# Altium PCB WaterLevelRF.PcbDoc
Units mm, origin at the board's own origin, x right, y up, seen from the top; angles counter-clockwise.
Board outline 44.25 x 29.25 mm, 2 copper layers (Top Layer, Bottom Layer); 33 components, 34 nets, 133 pads, 4 vias.
Unrouted connection lines stored in the file: 81.
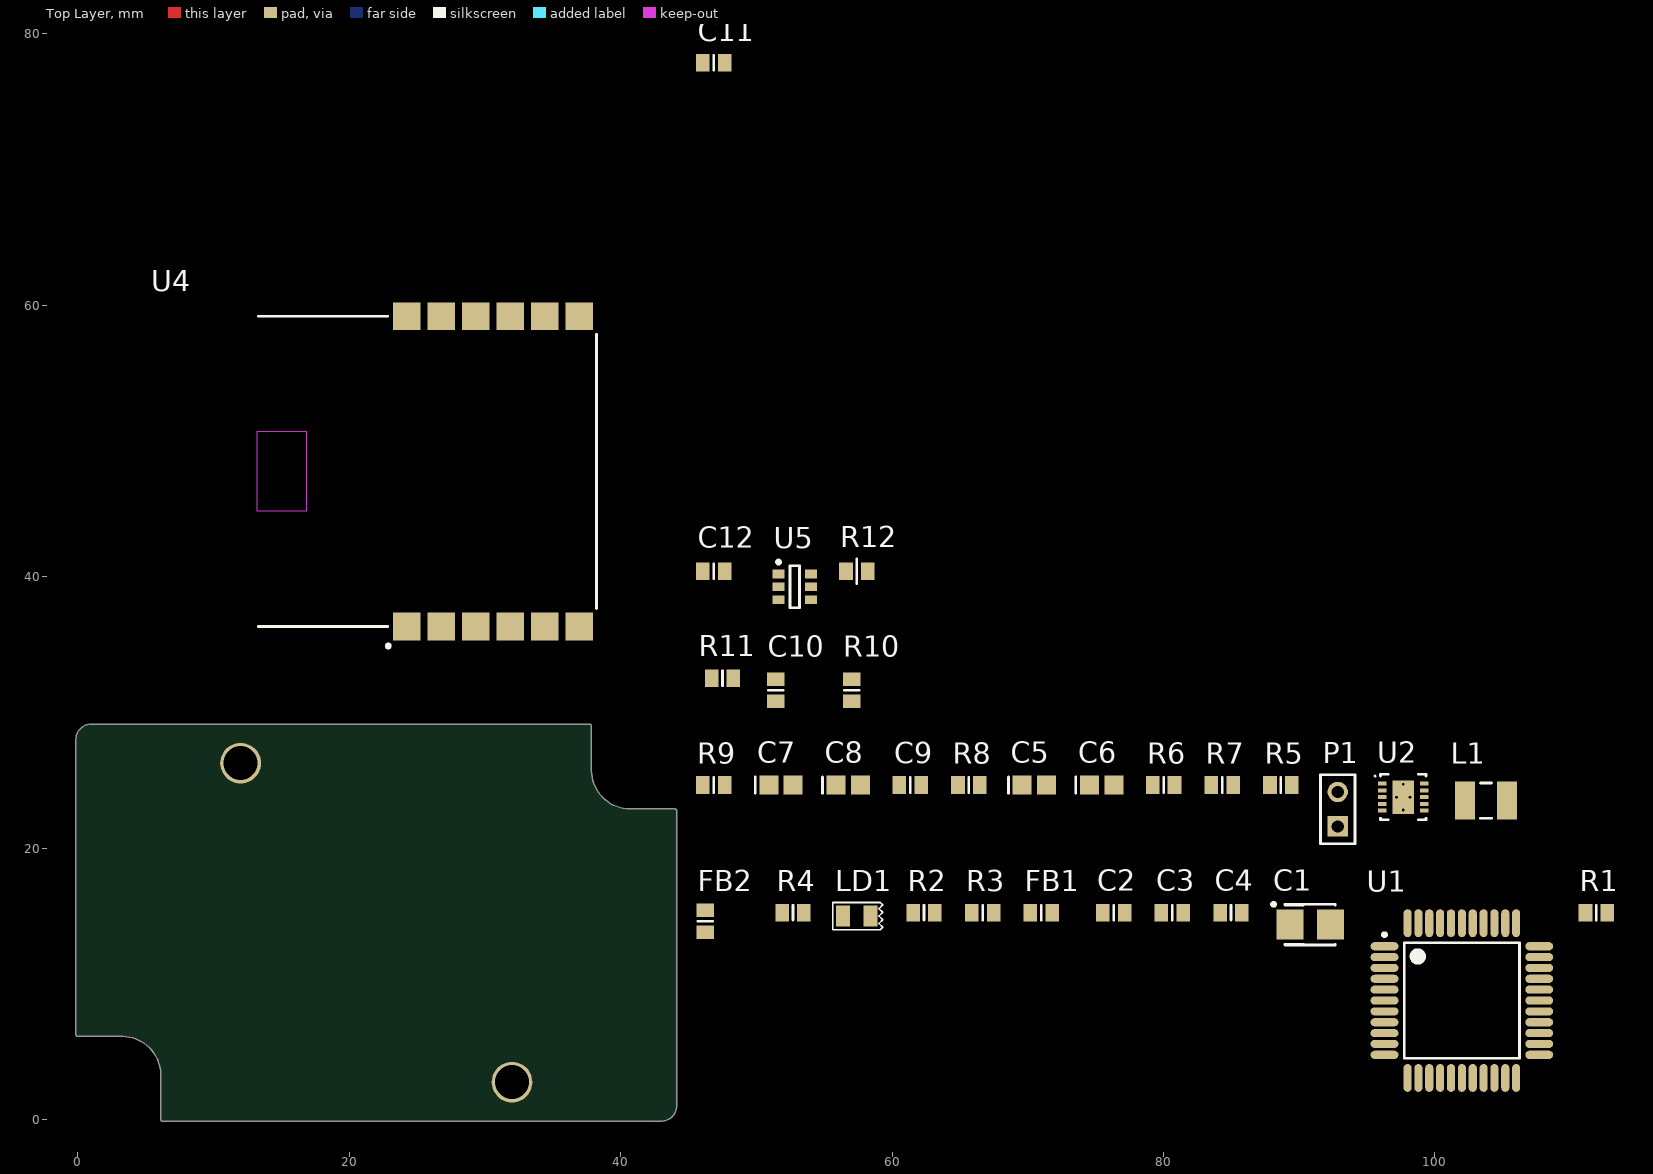
[diagram p0: Top Layer view]
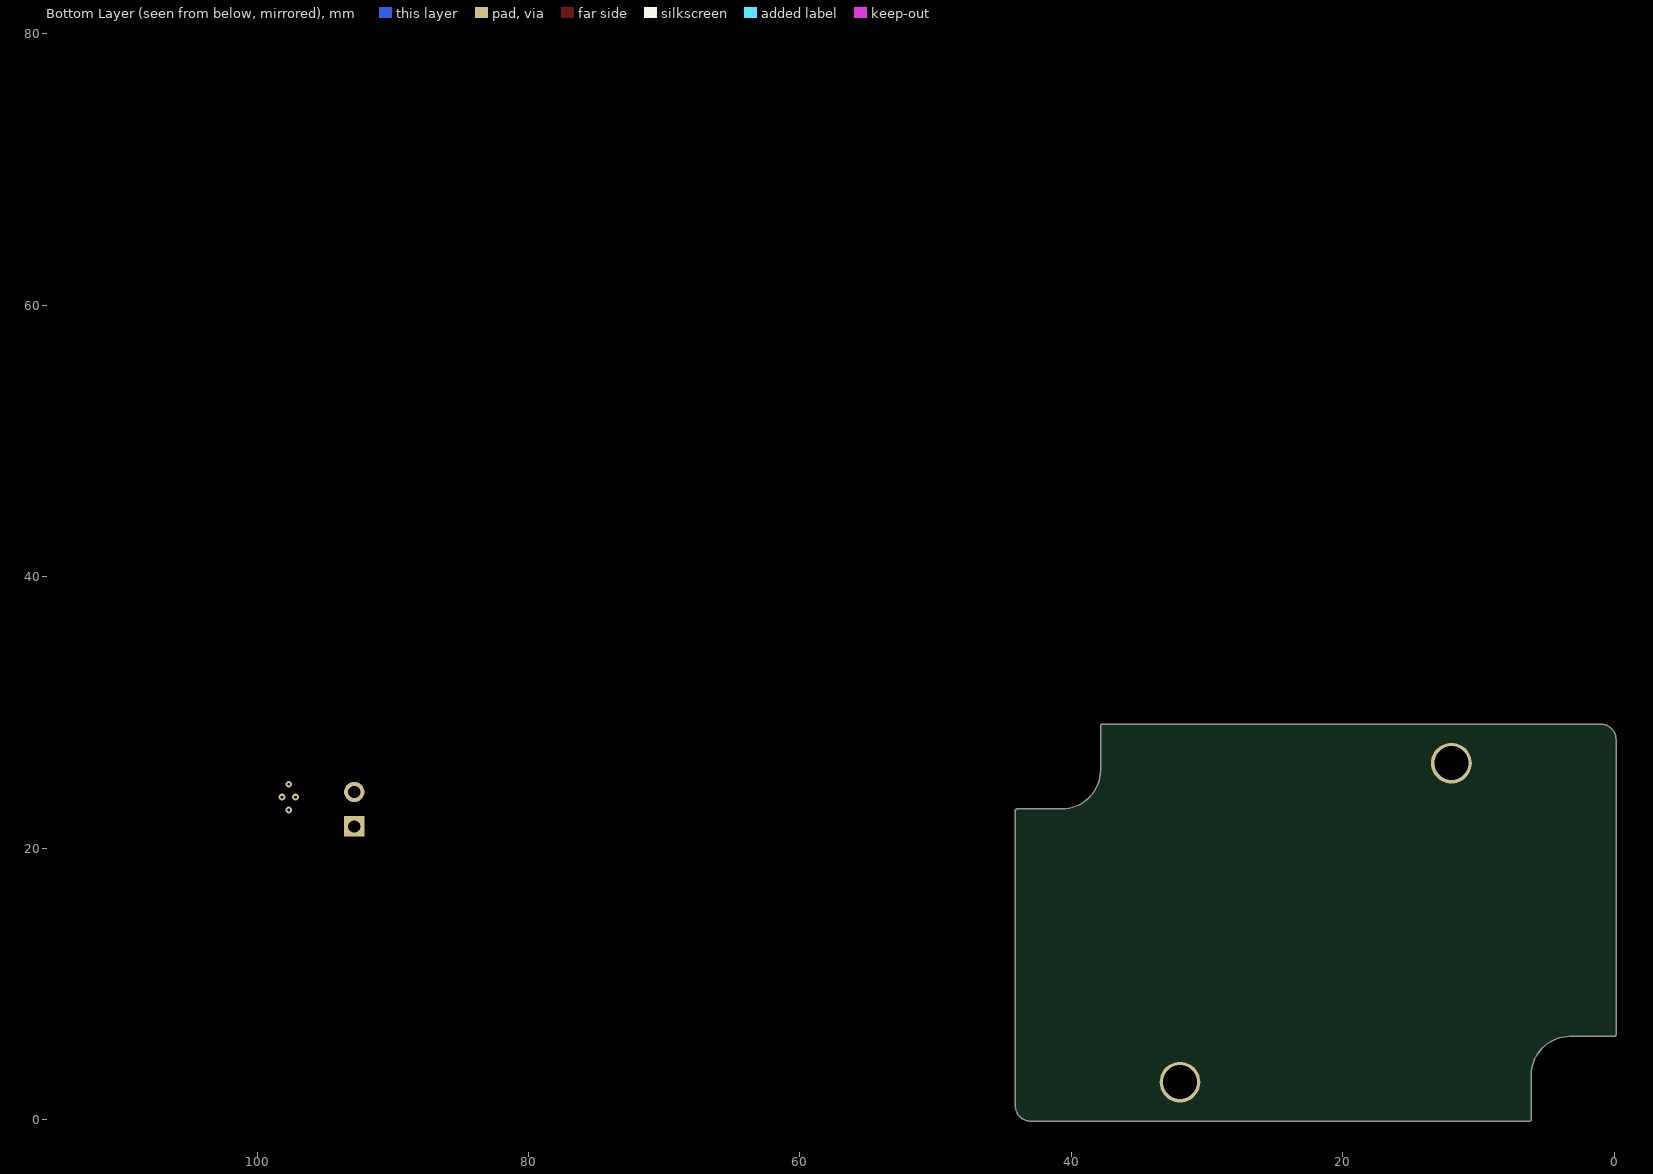
[diagram p1: Bottom Layer view, seen from below]

## Layer stack, top to bottom
Top Layer: signal copper 0.0356
Dielectric: dielectric 0.32, FR-4, Dk 4.8
Bottom Layer: signal copper 0.0356

## Board outline
3.3,6.122 cw(c3.25,3.25) 6.122,3.3 ccw(c6.25,3.302) 6.123,3.292 6.123,0.011 ccw(c6.25,0) 6.25,-0.127 43,-0.127 ccw(c43,1) 44.127,1 44.127,22.75 ccw(c44,22.75) 43.985,22.876 43.984,22.876 ccw(c43.969,22.75) 43.969,22.877 40.677,22.877 ccw(c40.667,22.75) 40.669,22.878 cw(c40.719,25.75) 37.847,25.7 ccw(c37.719,25.698) 37.846,25.708 37.846,29 ccw(c37.719,29) 37.719,29.127 1,29.127 ccw(c1,28) -0.127,28 -0.127,6.25 ccw(c0,6.25) 0,6.123 3.292,6.123 ccw(c3.302,6.25)

## Design rules (kind name [scope] priority, off if disabled: settings)
Clearance [All] p1: gap=0.254
PolygonConnect [All] p1: connectstyle=Relief reliefconductorwidth=0.254 reliefentries=4 polygonreliefangle="90 Angle"
RoutingVias [All] p1: holewidth=0.711 width=1.27 viastyle="Through Hole" minholewidth=0.711 minwidth=1.27 maxholewidth=0.711 maxwidth=1.27
SilkscreenOverComponentPads [All] p1: minsilkscreentomaskgap=0.254
SolderMaskExpansion [All] p1: expansion=0.102
Width [All] p1: maxlimit=0.254 minlimit=0.254 preferedwidth=0.254
27 further rules are at their usual default settings.

## Classes and differential pairs
component class U_ZIGBEE: C11 U4
component class U_SONAR: C10 R10 R11 U3
component class U_CPU: C1 C2 C3 C4 FB1 FB2 J1 LD1 R1 R2 R3 R4 R5 U1
component class U_PSU: C5 C6 C7 C8 C9 D1 L1 P1 P2 R5 R6 R7 R8 R9 R18 R19 U2
component class U_TEMP: C10 C12 R12 U5

## Components (designator, comment, footprint, x,y, rotation, side; value= is the part's Value field where it differs from the comment)
C1 "Cap Pol3" B 90.805,14.351 r0 top
C2 "CAP0603-" RESC2012L 76.327,15.24 r0 top
C3 "CAP0603-" RESC2012L 80.645,15.24 r0 top
C4 "CAP0603-" RESC2012L 84.963,15.24 r0 top
C5 "CAP0603-" CAPC2512L 70.485,24.638 r0 top
C6 "CAP0603-" CAPC2512L 75.438,24.638 r0 top
C7 "CAP0603-" CAPC2512L 51.816,24.638 r0 top
C8 "CAP0603-" CAPC2512L 56.769,24.638 r0 top
C9 "CAP0603-" RESC2012L 61.341,24.638 r0 top
C10 "CAP0805-100NF" RESC2012L 51.435,31.623 r90 top
C11 "CAP0603-" RESC2012L 46.863,77.851 r0 top
C12 "Cap Semi" RESC2012L 46.863,40.386 r0 top
FB1 "MMZ2012R121A" RESC2012L 70.993,15.24 r0 top
FB2 "MMZ2012R121A" RESC2012L 46.228,14.605 r90 top
L1 "?" INDC3225M 103.759,23.495 r0 top
LD1 "LED" LED805 56.388,14.986 r0 top
P1 "Header 2" HDR1X2 92.837,21.59 r90 top
R1 "RES0603-" RESC2012L 111.887,15.24 r0 top
R2 "RES0603-" RESC2012L 62.357,15.24 r0 top
R3 "RES0603-" RESC2012L 66.675,15.24 r0 top
R4 "RES0603-" RESC2012L 52.705,15.24 r0 top
R5 "RES0603-" RESC2012L 88.646,24.638 r0 top
R6 "RES0603-" RESC2012L 80.01,24.638 r0 top
R7 "RES0603-" RESC2012L 84.328,24.638 r0 top
R8 "RES0603-" RESC2012L 65.659,24.638 r0 top
R9 "RES0603-" RESC2012L 46.863,24.638 r0 top
R10 "RES0805-10K" RESC2012L 57.023,31.623 r90 top
R11 "RES0805-10K" RESC2012L 47.498,32.512 r0 top
R12 "Res Semi" RES0805 57.404,40.386 r0 top
U1 "PIC24HJ64GP504T-I/PT" TQFP-PT44_M 101.981,8.763 r0 top
U2 "TPS63060" SON50P300X300X100-11V 97.663,23.749 r0 top
U4 "MRF24J40MB-I/RM" MRF24J40MB 13.208,47.752 r90 top
U5 "TMP101" SOT23-6_L 52.832,39.243 r0 top

## Footprints (in the part's own frame and the unit in brackets; to place one, negate y for a bottom-side part, rotate by r counter-clockwise, add the part's x,y. Pads: shape width x height; smd on the part's side, far side on the other; paste and mask are expansions set on the pad)
B [mm] "Capacitor, SM Tantalum; Body 3.5 x 2.8 mm (LxW typ)"
  rect 2x2.2 smd: 1(-1.5,0) 2(1.5,0)
  silkscreen extent -2.82,-1.5 1.85,1.62
CAPC2512L [mm] "Chip Capacitor, Body 2.54x1.27mm, IPC High Density"
  rect 1.4x1.4 smd: 1(-0.9,0) 2(0.9,0)
  silkscreen extent -1.9,-0.6 -1.9,0.6, body extent -1.45,-0.82 1.45,0.82, height 1.66
HDR1X2 [mm] "Connector; Header; 2 Position"
  rect 1.5x1.5 hole 0.9: 1(0,0)
  round 1.5 hole 0.9: 2(2.54,0)
  silkscreen extent -1.27,-1.27 3.81,1.27
INDC3225M [mm] "Chip Inductor, Body 3.2x2.5mm, IPC Low Density"
  rect 1.5x2.8 smd: 1(-1.55,0) 2(1.55,0)
  silkscreen extent -0.4,-1.3 0.4,1.3, body extent -1.7,-1.35 1.7,1.35, height 1.5
LED805 [mil]
  rect 40x60 smd: A(0,0) K(80,0)
  silkscreen extent -30,-39 115,39
MRF24J40MB [mil] "SM Module; 12 Leads; Body 33x22.9x2.5mm (LxWxH), Microchip Recommended"
  rect 80x80 smd paste-159.45 mask+2: 1(-450,-435) 2(-450,-535) 3(-450,-635) 4(-450,-735) 5(-450,-835) 6(-450,-935) 7(450,-935) 8(450,-835) 9(450,-735) 10(450,-635) 11(450,-535) 12(450,-435)
  Top Layer keep-out region: -115,-145 115,-145 115,0 -115,0
  silkscreen extent -511,-985 450,-4, body extent -450,-985 450,315, height 100
RES0805 [mm] "Chip Resistor Body 2.0x1.3mm, IPC High Density"
  rect 1x1.3 smd: 1(-0.8,0) 2(0.8,0)
  silkscreen extent 0,-0.9 0,0.9, body extent -1.07,-0.7 1.07,0.7, height 0.65
RESC2012L [mm] "Chip Resistor, Body 2.0x1.3mm, IPC High Density"
  rect 1x1.3 smd: 1(-0.8,0) 2(0.8,0)
  silkscreen extent 0,-0.55 0,0.55, body extent -1.07,-0.7 1.07,0.7, height 0.65
SON50P300X300X100-11V [mm] "SON, 10-Leads, Body 3x3mm, Pitch 0.5mm, Microchip Recommended"
  rect 0.65x0.3 smd: 1(-1.55,1) 2(-1.55,0.5) 3(-1.55,0) 4(-1.55,-0.5) 5(-1.55,-1) 6(1.55,-1) 7(1.55,-0.5) 8(1.55,0) 9(1.55,0.5) 10(1.55,1)
  rect 1.55x2.48 smd: 11(0,0)
  silkscreen extent -2.12,-1.68 1.67,1.68, body extent -1.52,-1.52 1.52,1.52, height 1
SOT23-6_L [mm] "SOT23, 6-Leads, Body 2.9x1.6mm, Pitch 0.95mm, Lead Span 2.8mm, IPC High Density"
  rect 0.9x0.65 smd: 1(-1.2,0.95) 2(-1.2,0) 3(-1.2,-0.95) 4(1.2,-0.95) 5(1.2,0) 6(1.2,0.95)
  silkscreen extent -1.32,-1.55 0.35,1.95, body extent -0.9,-1.55 0.9,1.55, height 1.45
TQFP-PT44_M [mm] "Thin QFP, 44-Leads, Body 10x10mm, Pitch 0.8mm, IPC Low Density"
  oval 2.05x0.6 smd: 1(-5.7,4) 2(-5.7,3.2) 3(-5.7,2.4) 4(-5.7,1.6) 5(-5.7,0.8) 6(-5.7,0) 7(-5.7,-0.8) 8(-5.7,-1.6) 9(-5.7,-2.4) 10(-5.7,-3.2) 11(-5.7,-4) 23(5.7,-4) 24(5.7,-3.2) 25(5.7,-2.4) 26(5.7,-1.6) 27(5.7,-0.8) 28(5.7,0) 29(5.7,0.8) 30(5.7,1.6) 31(5.7,2.4) 32(5.7,3.2) 33(5.7,4)
  oval 0.6x2.05 smd: 12(-4,-5.7) 13(-3.2,-5.7) 14(-2.4,-5.7) 15(-1.6,-5.7) 16(-0.8,-5.7) 17(0,-5.7) 18(0.8,-5.7) 19(1.6,-5.7) 20(2.4,-5.7) 21(3.2,-5.7) 22(4,-5.7) 34(4,5.7) 35(3.2,5.7) 36(2.4,5.7) 37(1.6,5.7) 38(0.8,5.7) 39(0,5.7) 40(-0.8,5.7) 41(-1.6,5.7) 42(-2.4,5.7) 43(-3.2,5.7) 44(-4,5.7)
  silkscreen extent -5.82,-4.25 4.25,4.97, body extent -5,-5 5,5, height 1.2

## Part data
C1: "Polarized Capacitor (Surface Mount)"
C2 C3 C4 C5 C6 C7 C8 C9 C11: library part "Cap Semi", "Capacitor (Semiconductor SIM Model)"
C10: library part "CAP 0805 100nF", "CAP 0805 100nF"
C12: "Capacitor (Semiconductor SIM Model)"
FB1 FB2 L1: library part Inductor, "Inductor"
P1: "Header, 2-Pin"
R1 R2 R3 R4 R5 R6 R7 R8 R9 R10 R11: library part "Res Semi", "Semiconductor Resistor"
R12: "Semiconductor Resistor"
U1: "High Speed General Purpose 16-Bit Flash Microcontroller, 64KB Flash, 8KB RAM, 44-Pin TQFP, Industrial Temperature, Tape and Reel"
U2: "Buck-Boost Regulator"
U4: "2.4 GHz IEEE Std. 802.15.4, 20 dBm RF Transceiver 12-Pin Module, Industrial Temperature"
U5: "I2C Temperature Sensor"

## Free pads (board coordinates)
  round 3 hole 2.5: 0(12,26.25) 0(32,2.75)

## Via types
v1: diameter 0.5, hole 0.2, Top Layer to Bottom Layer, tented top, 4 vias

## Nets (pads, with @x,y where several pads share a name; then routed paths per layer and width w, separated by ;. In a path a pad name is that pad's centre, name@x,y a point inside that pad or via, vN(x,y) a via of type N, cw(c..) or ccw(c..) an arc to the next point about the centre after c; other vN are vias at no path point)
3V3: C3.2 C4.2 C5.2 C6.2 C10.1 C11.2 FB1.1 R1.2 R2.2 R3.2 R4.2 R5.1 R7.1 R10.2 U1.28 U1.40 U2.9 U4.10
AGND: C2.1 FB2.2 U1.16
BW: R10.1 R11.2
GND: C1.2 C3.1 C4.1 C5.1 C6.1 C7.1 C8.1 C9.1 C10.2 C11.1 C12.1 FB2.1 P1.2 R8.1 R9.1 R11.1 U1.6 U1.29 U1.39 U2.4 U2.7 U2.11 U4.1 U4.11 U4.12 U5.2 U5.5
  other v1: 97.663,22.799 97.163,23.749 98.163,23.749 97.663,24.699
LED: LD1.K U1.25
MCLR: R1.1 U1.18
MISO: U1.9 U4.7
MOSI: U1.10 U4.5
NetC1_1: C1.1 U1.7
NetC2_2: C2.2 FB1.2 U1.17
NetC9_2: C9.2 U2.6
NetL1_1: L1.1 U2.1
NetL1_2: L1.2 U2.10
NetLD1_A: LD1.A R4.1
NetR5_2: R5.2 R8.2 U2.8
PGC: U1.22
PGD: U1.21
PGOOD: R7.2 U1.35 U2.5
RNGAN: U1.38
RNGPWM: U1.2
RNGSLP: U1.3
SCK: U1.8 U4.6
SCL: R2.1 U1.44 U5.1
SDA: R3.1 U1.1 U5.6
TALERT: R12.1 U1.4 U5.3
U1RX: U1.36
U1TX: U1.37
VBAT: R6.2 R9.2 U1.19
VCC3: C12.2 R12.2 U5.4
VIN: C7.2 C8.2 P1.1 R6.1 U2.2 U2.3
ZCS: U1.31 U4.8
ZINT: U1.43 U4.4
ZRST: U1.13 U4.2
ZWAKE: U1.34 U4.3
pads on no net: U1.5 U1.11 U1.12 U1.14 U1.15 U1.20 U1.23 U1.24 U1.26 U1.27 U1.30 U1.32 U1.33 U1.41 U1.42 U4.9

## Silkscreen, mask and mechanical layers (free items; w line width, h text height)
Mechanical 1:
  lines w0.254: 0,13 0,0 28,0 ; 40.667,22.75 43.969,22.75 ; 40.667,22.75 cw(c40.719,25.75) 37.719,25.698 37.719,29 1,29 ccw(c1,28) 0,28 0,6.25 3.302,6.25 cw(c3.25,3.25) 6.25,3.302 6.25,0 43,0 ccw(c43,1) 44,1 44,22.75